# Altium PCB BMS_Slavee.PcbDoc (part 3 of 4)
Units mm, origin at the board's own origin, x right, y up, seen from the top; angles counter-clockwise.
Board outline 197.87 x 123.44 mm, 2 copper layers (Top Layer, Bottom Layer); 344 components, 178 nets, 953 pads, 755 vias.
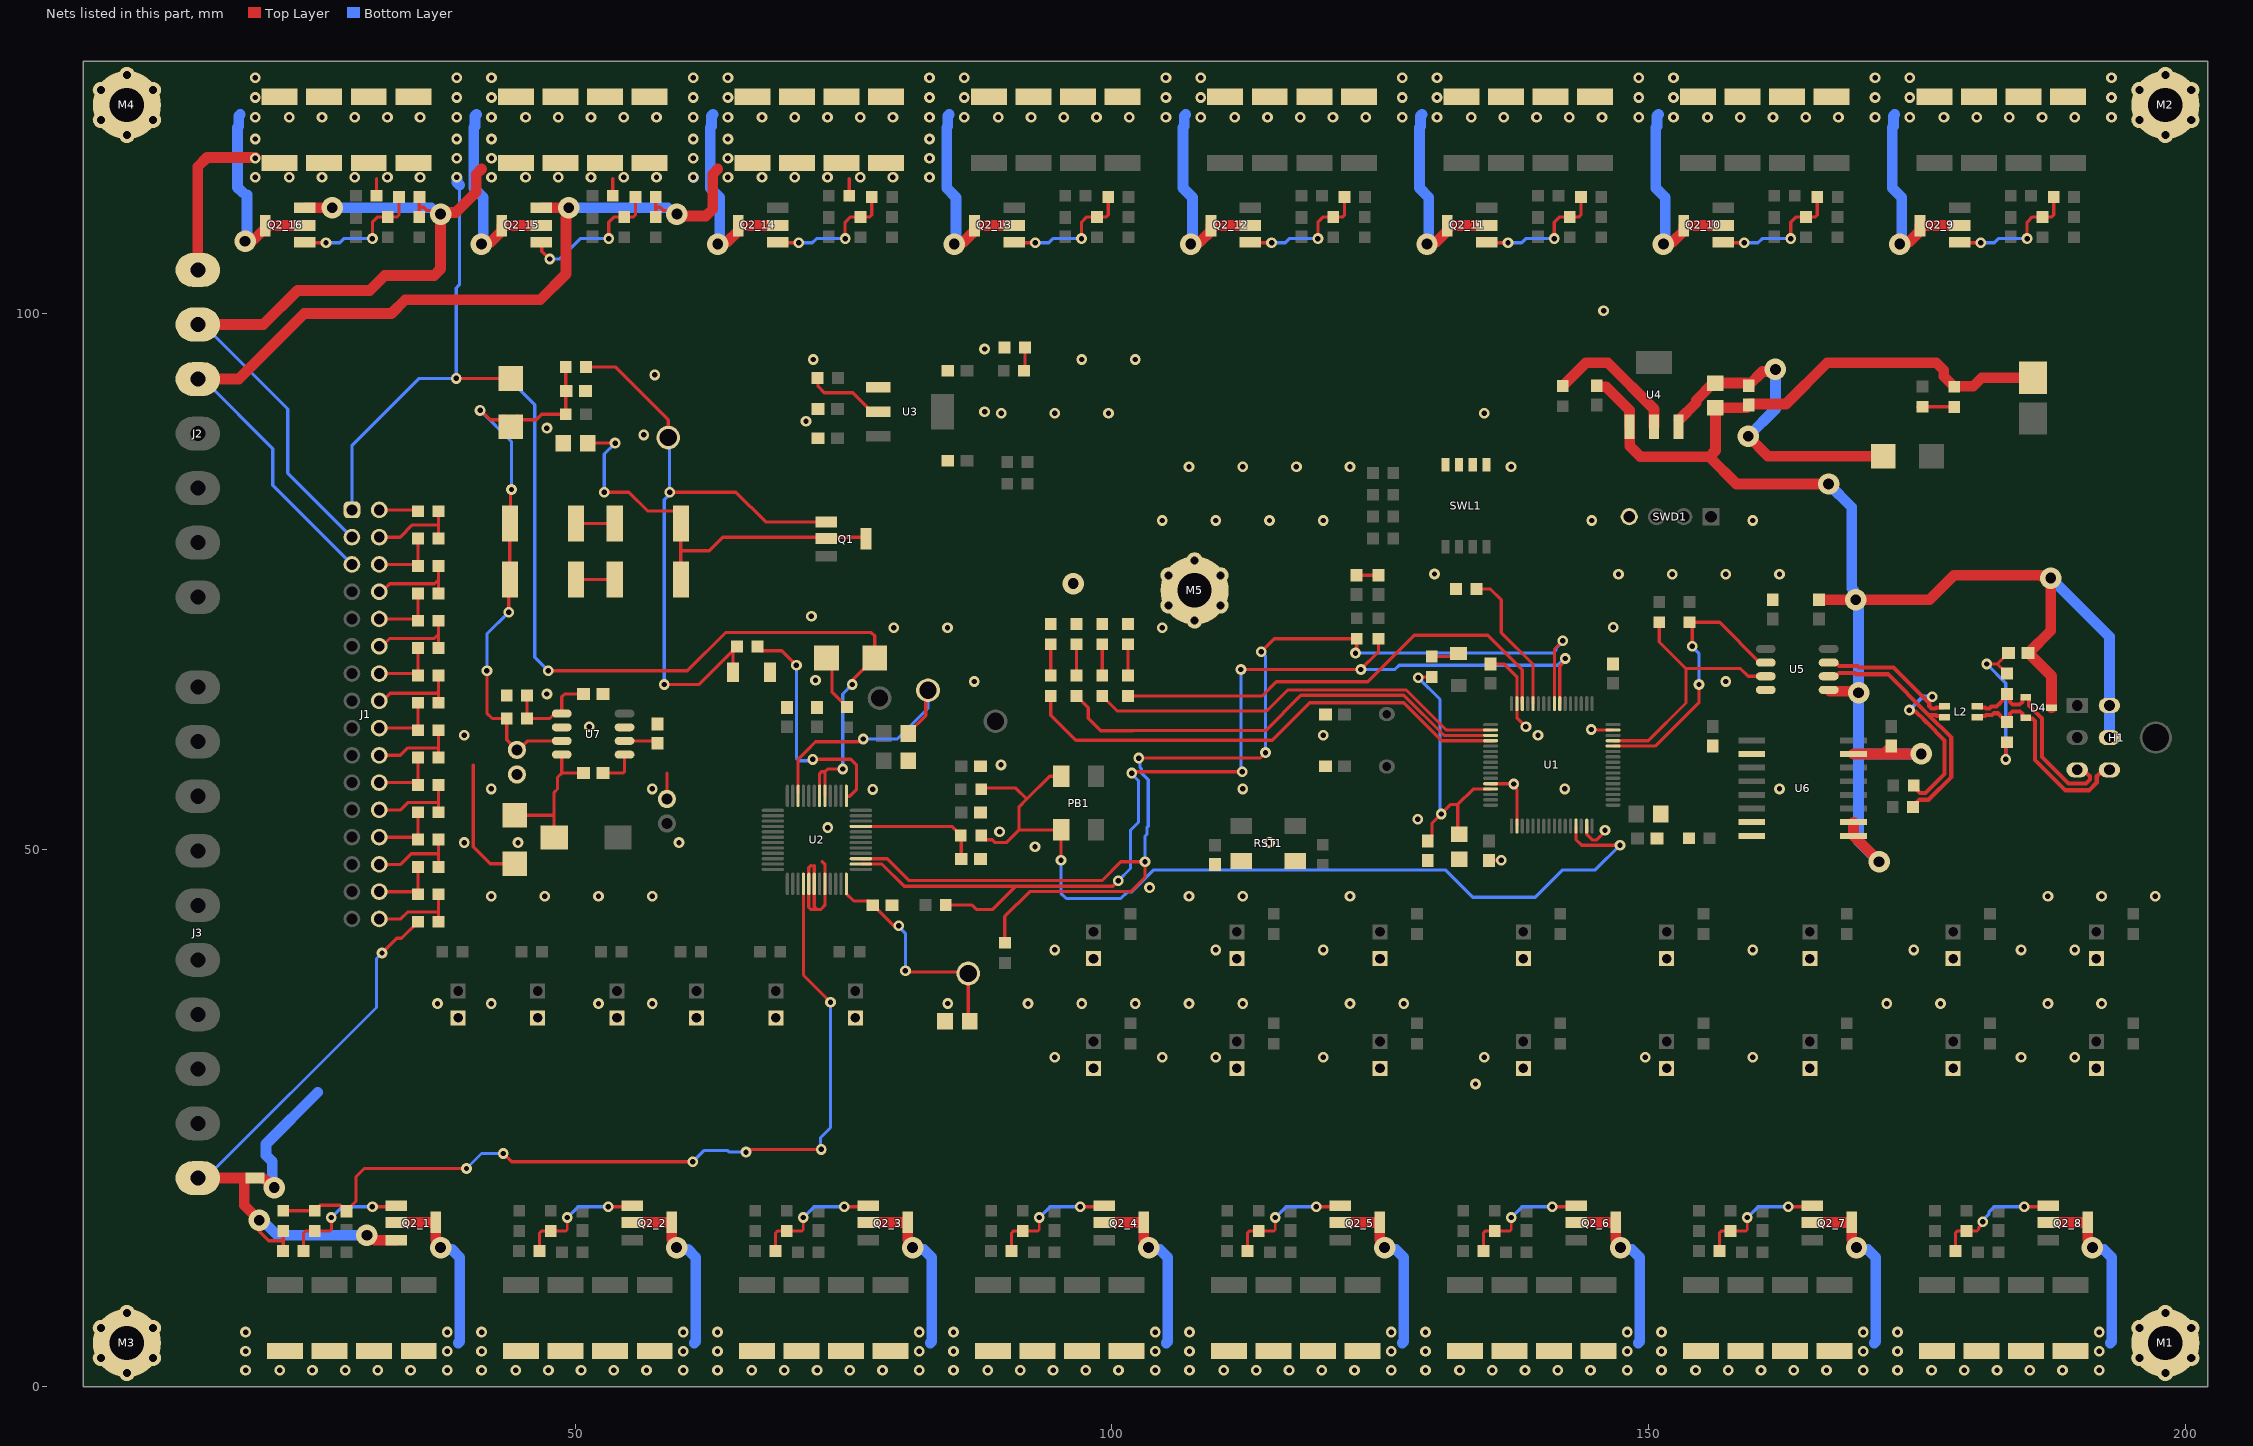
[diagram p3: the nets of this part, all layers, seen from the top]

## Via types
v1: diameter 1, hole 0.5, Top Layer to Bottom Layer, tented both sides, 697 vias
v2: diameter 2, hole 1, Top Layer to Bottom Layer, tented both sides, 58 vias

## Nets (pads, with @x,y where several pads share a name; then routed paths per layer and width w, separated by ;. In a path a pad name is that pad's centre, name@x,y a point inside that pad or via, vN(x,y) a via of type N, cw(c..) or ccw(c..) an arc to the next point about the centre after c; other vN are vias at no path point) (continued)
+Cell_14: J1.5 J2.5 Q2_15.3 R40_14.1 R41_14.1 R42_14.1 R43_14.1 R44_14.1 R46_15.1 R47_15.1 | length 94.3
  Top Layer w0.3: R47_15.1@57.502,108.957 57.502,109.855 ; R46_15.1@57.512,110.801 57.502,110.791 57.502,109.855 ; v2(59.483,109.22) 59.158,109.545 58.236,109.545 57.926,109.855 57.502,109.855 ; R40_14.1@75.527,110.928 75.527,112.517
  Top Layer w1: J2.5@14.859,93.853 18.669,93.853 24.765,99.949 32.893,99.949 34.179,101.235 46.752,101.235 49.149,103.632 49.149,108.847 49.213,108.911 49.213,109.618 v2(49.404,109.809) Q2_15.3@46.845,109.809 ; v2(59.483,109.22) 59.674,109.029 62.166,109.029 62.811,109.674 62.811,112.929 63.293,113.411
  Bottom Layer w0.3: J2.5@14.859,93.853 15.359,93.853 21.844,87.368 21.844,83.947 J1.5@29.21,76.581
  Bottom Layer w1: v2(49.404,109.809) 58.623,109.809 59.212,109.22 v2(59.483,109.22)
  other v1: 64.229,112.649 67.404,112.649 70.452,112.649 73.5,112.649 76.548,112.649 79.596,112.649 83.01,112.649 64.229,114.427 83.01,114.427 64.229,116.205 83.01,116.205
+Cell_15: J1.3 J2.6 Q2_16.3 R40_15.1 R41_15.1 R42_15.1 R43_15.1 R44_15.1 R46_16.1 R47_16.1 | length 81
  Top Layer w0.3: R47_16.1@35.484,108.957 35.484,109.855 ; R46_16.1@35.494,110.801 35.484,110.791 35.484,109.855 ; v2(37.465,109.22) 37.14,109.545 36.218,109.545 35.908,109.855 35.484,109.855 ; R40_15.1@53.509,110.928 53.509,112.517
  Top Layer w1: J2.6@14.859,98.933 20.955,98.933 24.13,102.108 30.861,102.108 32.258,103.505 36.879,103.505 37.465,104.091 v2(37.465,109.22) 37.598,109.353 38.868,109.353 40.793,111.278 40.793,112.929 41.275,113.411 ; Q2_16.3@24.827,109.809 v2(27.386,109.809)
  Bottom Layer w0.3: J2.6@14.859,98.933 15.367,98.933 23.241,91.059 23.241,85.09 J1.3@29.21,79.121
  Bottom Layer w1: v2(27.386,109.809) 36.605,109.809 37.194,109.22 v2(37.465,109.22) ; v1(60.992,112.649) v1@61.015,112.626
  other v1: 42.211,112.649 45.386,112.649 48.434,112.649 51.482,112.649 54.53,112.649 57.578,112.649 42.211,114.427 60.992,114.427 42.211,116.205 60.992,116.205
+Cell_16: D1.1 D2.1 J1.1 J2.7 R40_16.1 R41_16.1 R42_16.1 R43_16.1 R44_16.1 U2.41 U2.42 | length 145.2
  Top Layer w0.3: R40_16.1@31.491,110.928 31.491,112.517 ; v1(38.934,93.908) D2.1@44.012,93.908 ; v1(47.498,66.675) 60.452,66.675 64.008,70.231 77.597,70.231 77.906,69.922 D1.1@77.906,67.875 75.819,65.788 v1(75.819,65.405) ; U2.42@72.767,55.027 72.767,57.101 72.943,57.277 73.152,57.277 ; U2.41@73.267,55.027 73.267,57.162 73.152,57.277 ; v1(74.93,57.531) 73.521,57.531 73.267,57.277 73.152,57.277
  Top Layer w1: J2.7@14.859,104.013 14.859,113.633 15.716,114.49 v1@20.193,114.49
  Bottom Layer w0.3: J1.1@29.21,81.661 29.21,87.63 35.488,93.908 v1(38.934,93.908) ; 39.219,111.928 39.219,102.616 38.934,102.331 v1(38.934,93.908) ; v1(47.498,66.675) 46.228,67.945 46.228,91.44 43.76,93.908 v1(38.934,93.908) ; v1(74.93,57.531) 74.93,64.516 v1(75.819,65.405)
  Bottom Layer w1: v1(38.974,112.649) 38.997,112.626 38.997,112.15 39.219,111.928
  other v1: 20.193,112.649 23.368,112.649 26.416,112.649 29.464,112.649 32.512,112.649 35.56,112.649 20.193,114.427 38.974,114.427 20.193,116.205 38.974,116.205
-BalanceCommand_1: C25_1.1 R45_1.2 R47_1.2 U2.16 | length 81.2
  Top Layer w0.3: R47_1.2@22.809,16.387 R45_1.2@25.743,16.387 26.247,16.891 28.126,16.891 28.231,16.787 28.302,16.787 C25_1.1@28.702,16.387 ; C25_1.1@28.702,16.337 C25_1.1@28.702,16.387 ; v1(39.878,20.32) 30.353,20.32 29.591,19.558 29.591,17.276 C25_1.1@28.702,16.387 ; v1(43.307,21.717) 44.084,20.94 60.945,20.94 v1(60.96,20.955) ; v1(65.913,21.844) 66.04,21.844 66.294,22.098 v1(72.913,22.098) ; U2.16@71.267,46.827 71.267,38.334 v1(73.787,35.814)
  Bottom Layer w0.3: v1(39.878,20.32) 41.275,21.717 v1(43.307,21.717) ; v1(60.96,20.955) 61.991,21.986 64.227,21.986 64.369,21.844 v1(65.913,21.844) ; v1(72.913,22.098) 72.855,22.156 72.855,23.198 73.787,24.13 v1(73.787,35.814)
-Cell_1: J3.1 NT1.1 Q2_1.3 R27.1 R46_1.1 R47_1.1 | length 60.4
  Top Layer w0.3: v2(20.574,15.494) 20.574,14.478 21.463,13.589 22.809,13.589 ; R46_1.1@22.799,12.643 22.809,12.653 22.809,13.589 ; R47_1.1@22.809,14.487 22.809,13.589 ; v1(32.004,40.386) 33.379,41.761 33.826,41.761 R27.1@35.372,43.307
  Top Layer w1: J3.1@15.113,19.431 19.177,19.431 19.177,16.891 v2(20.574,15.494) ; v2(30.607,14.097) 30.878,14.097 31.34,13.635 Q2_1.3@33.339,13.635
  Bottom Layer w0.3: J3.1@15.113,19.431 15.613,19.431 31.496,35.314 31.496,39.878 v1(32.004,40.386)
  Bottom Layer w1: v2(20.574,15.494) 20.845,15.494 22.242,14.097 v2(30.607,14.097)
BOOT0: R11.2 U1.60 | length 13.6
  Top Layer w0.3: R11.2@133.961,74.295 135.255,74.295 136.271,73.279 136.271,70.231 139.22,67.282 U1.60@139.22,63.612
BREG: R34.2 U2.37 | length 22.5
  Top Layer w0.3: R34.2@66.98,68.943 67.38,68.543 69.252,68.543 v1(70.612,67.183) ; v1(72.136,58.42) 72.151,58.435 75.685,58.435 76.2,57.92 76.2,57.8 76.215,57.785 76.215,55.641 75.562,54.988 75.267,54.988 U2.37@75.267,55.027
  Bottom Layer w0.3: v1(70.612,67.183) 70.612,58.547 70.866,58.293 72.009,58.293 v1(72.136,58.42)
CAN_N: D4.1 H1.3 L2.4 R49.1 | length 19.5
  Top Layer w0.381: L2.4@180.595,63.365 180.705,63.255 181.338,63.255 181.411,63.182 181.726,63.182 181.902,63.358 182.409,63.358 182.703,63.653 182.703,63.692 R49.1@183.063,64.052 ; R49.1@183.37,64.521 183.645,64.246 183.645,63.761 183.868,63.538 184.551,63.538 184.799,63.787 184.799,64.087 184.909,64.196 D4.1@185.109,64.196 185.309,64.196 185.419,64.087 185.419,63.453 186.618,62.253 186.618,58.646 189.084,56.18 190.738,56.18 191.094,56.536 191.094,56.852 190.87,57.075 190.864,57.075 190.487,57.452 H1.3@189.911,57.452
CAN_P: D4.2 H1.4 L2.3 R50.1 | length 19.5
  Top Layer w0.381: L2.3@180.595,62.365 180.705,62.475 181.338,62.475 181.411,62.547 181.989,62.547 182.165,62.723 182.512,62.723 R50.1@183.063,62.172 ; R50.1@183.37,61.92 183.645,62.195 183.645,62.68 183.868,62.903 184.576,62.903 184.799,62.68 184.799,62.406 184.909,62.296 D4.2@185.109,62.296 185.192,62.213 185.76,62.213 185.983,61.99 185.983,58.383 188.821,55.545 191.001,55.545 191.729,56.273 191.729,56.852 191.952,57.075 191.958,57.075 192.335,57.452 H1.4@192.911,57.452
CAN_RX: R48.2 U1.44 U5.2 | length 26.2
  Top Layer w0.3: U1.44@146.67,59.662 150.594,59.662 154.686,63.754 v1(154.686,65.405) ; v1(154.051,68.961) 154.051,70.942 R48.2@153.797,71.196 156.596,71.196 160.355,67.437 U5.2@160.905,67.437
  Bottom Layer w0.3: v1(154.051,68.961) 154.051,68.888 154.686,68.253 v1(154.686,65.405)
CAN_TX: R36.2 U1.45 U5.3 | length 24.5
  Top Layer w0.3: U1.45@146.67,60.162 149.951,60.162 153.467,63.678 153.467,66.878 ; R36.2@150.985,71.196 150.985,69.36 153.467,66.878 ; U5.3@160.905,66.167 159.258,66.167 158.547,66.878 153.467,66.878
CANIN_N: L2.1 R56.2 U5.7 | length 27.7
  Top Layer w0.381: U5.7@166.755,67.437 167.395,67.437 167.713,67.12 169.456,67.12 169.583,66.992 172.793,66.992 175.074,64.711 176.127,63.658 ; v1(174.281,63.018) 174.399,62.9 174.837,62.9 175.665,62.072 175.851,61.886 177.546,60.191 177.546,57.048 175.798,55.3 175.259,55.3 175.036,55.523 175.036,55.629 R56.2@174.676,55.989 ; v1(176.403,64.262) 176.403,64.094 176.127,63.819 176.127,63.658 ; L2.1@177.545,63.365 177.435,63.255 176.802,63.255 176.729,63.182 176.35,63.182 176.127,63.406 176.127,63.658
  Bottom Layer w0.381: v1(174.281,63.018) 175.525,64.262 v1(176.403,64.262)
CANIN_P: L2.2 R57.1 U5.6 | length 24
  Top Layer w0.381: U5.6@166.755,66.167 167.395,66.167 167.713,66.484 169.193,66.484 169.32,66.358 172.239,66.358 ; 172.277,66.358 175.928,62.707 176.114,62.521 178.181,60.454 178.181,56.785 176.061,54.665 175.203,54.665 174.98,54.441 174.98,54.335 R57.1@174.62,53.975 ; 176.141,62.547 176.729,62.547 176.802,62.475 177.435,62.475 L2.2@177.545,62.365
GND: C1.2 C2.1 C3.2 C4.1 C5.2 C6.2 C8.2 C9.2 C10.2 C11.2 C12.1 C13.1 C14.1 C15.1 C16.1 C17.1 C18.1 C19.1 C21.2 C22.1 C23.1 C24.1 C30.1 C32.2 C33.1 C34.1 C35.1 C36.1 C37.2 C38.2 C39.2 C40.1 D3.2 D9.1 LED1.2 LED2.2 LED3.2 LED4.2 LED5.2 NT1.2 R11.1 R58.2 R73.1 RST1.2 SWD1.4 SWL1.1 SWL1.2 SWL1.3 SWL1.4 TS_1.2 TS_2.2 TS_3.2 TS_4.2 TS_5.2 TS_6.2 TS_7.2 TS_8.2 TS_9.2 TS_10.2 TS_11.2 TS_12.2 TS_13.2 TS_14.2 TS_15.2 TS_16.2 TS_17.2 TS_18.2 TS_19.2 TS_20.2 TS_21.2 TS_22.2 U1.12 U1.18 U1.31 U1.47 U1.63 U2.17 U2.18 U2.20 U3.1 U5.4 U6.2 U6.7 U6.8 U7.3 U7.6 | length 63.7
  Top Layer w0.3: 40.513,57.912 40.513,50.292 42.092,48.713 D9.1@44.38,48.713 ; C34.1@58.547,54.737 58.547,57.15 ; 72.009,48.514 71.943,48.514 71.767,48.338 U2.17@71.767,46.827 71.767,44.626 71.943,44.45 72.517,44.45 ; 72.263,48.514 72.267,48.51 U2.18@72.267,46.827 72.267,44.7 72.517,44.45 ; 73.025,48.895 73.267,48.653 U2.20@73.267,46.827 73.267,44.819 72.898,44.45 72.517,44.45 ; C24.1@79.474,44.831 C24.1@79.524,44.831 ; C3.2@122.784,75.576 C1.2@124.841,75.576 ; C9.2@135.128,49.011 135.139,49.022 v1(136.271,49.022) ; C10.2@135.255,67.321 136.514,67.321 137.72,66.115 U1.63@137.72,63.612 137.72,62.305 v1(138.557,61.468) ; U1.12@135.27,56.162 137.386,56.162 v1(137.414,56.134) 137.414,55.945 137.72,55.639 U1.18@137.72,52.212 ; U1.31@144.22,52.212 144.22,51.455 144.748,50.927 145.161,50.927 145.923,51.689 v1(145.923,51.816) ; v1(144.653,61.214) 144.705,61.162 U1.47@146.67,61.162
  Top Layer w1: NT1.2@21.005,19.371 v2(21.971,18.542)
  Bottom Layer w1: v2(21.971,18.542) 21.78,18.733 21.78,20.971 21.209,21.542 21.209,22.606 26.035,27.432
  other v1: 133.858,28.194 94.68,30.676 104.68,30.676 109.68,30.676 119.68,30.676 134.68,30.676 149.68,30.676 159.68,30.676 184.68,30.676 189.68,30.676 37.18,35.676 42.18,35.676 52.18,35.676 57.18,35.676 84.709,35.687 92.18,35.676 97.18,35.676 102.18,35.676 107.18,35.676 112.18,35.676 122.18,35.676 127.18,35.676 172.18,35.676 177.18,35.676 187.18,35.676 192.18,35.676 94.68,40.676 109.68,40.676 119.68,40.676 159.68,40.676 174.68,40.676 184.68,40.676 189.68,40.676 42.18,45.676 47.18,45.676 52.18,45.676 57.18,45.676 107.18,45.676 112.18,45.676 122.18,45.676 187.18,45.676 192.18,45.676 197.18,45.676 103.505,46.482 92.837,50.292 39.68,50.676 44.68,50.676 59.68,50.676 114.68,50.676 89.535,51.689 73.533,52.07 128.486,52.853 77.724,55.626 42.18,55.676 57.18,55.676 112.18,55.676 142.18,55.676 162.18,55.676 89.662,57.912 39.68,60.676 119.68,60.676 139.68,60.676 51.308,61.468 47.371,64.516 87.18,65.676 157.18,65.676 72.39,65.786 79.68,70.676 84.68,70.676 104.68,70.676 146.685,70.739 72.009,71.755 147.18,75.676 152.18,75.676 157.18,75.676 162.18,75.676 130.048,75.692 104.68,80.676 109.68,80.676 114.68,80.676 119.68,80.676 144.68,80.676 159.68,80.676 107.18,85.676 112.18,85.676 117.18,85.676 122.18,85.676 137.18,85.676 56.388,88.646 47.371,89.281 71.501,89.916 89.68,90.676 94.68,90.676 99.68,90.676 134.68,90.676 88.138,90.805 57.404,94.234 72.18,95.676 97.18,95.676 102.18,95.676 88.138,96.647 145.796,100.203
  other v2: 96.393,74.803
GND-ISO: C26.1 C27.1 C28.1 C29.1 C31.1 C41.1 D4.3 D8.2 H1.5 H1.6 LED6.2 U4.1 U5.5 U6.9 U6.10 U6.15 | length 175.9
  Top Layer w1: C26.1@145.161,93.229 145.161,93.179 145.211,93.129 146.012,93.129 148.205,90.936 U4.1@148.205,89.404 148.23,89.379 148.23,87.609 149.225,86.614 155.624,86.614 ; C29.1@159.321,91.429 159.321,91.379 159.121,91.179 C27.1@156.21,91.179 156.21,87.2 155.624,86.614 ; C29.1@159.371,91.529 162.776,91.529 166.624,95.377 176.772,95.377 177.479,94.67 177.479,94.123 LED6.2@178.463,93.139 ; C31.1@165.862,73.29 v2(169.28,73.29) 176.16,73.29 178.435,75.565 186.491,75.565 186.554,75.502 187.261,75.502 v2(187.452,75.311) 187.452,70.413 C28.1@185.365,68.326 ; v2(166.751,84.074) 158.164,84.074 155.624,86.614 ; U5.5@166.88,64.772 169.416,64.772 v2(169.545,64.643) ; U6.10@169.072,52.578 U6.9@169.072,51.308 171.358,49.022 v2@171.405,49.022 ; U6.15@169.072,58.928 171.886,58.928 ; C41.1@172.593,59.685 172.593,59.635 171.886,58.928 ; v2(175.387,58.928) 171.886,58.928 ; LED6.2@178.513,93.189 180.222,93.189 181.013,93.98 D8.2@185.801,93.98 ; C28.1@185.315,68.326 C28.1@185.365,68.326 ; D4.3@187.509,63.246 187.509,66.182 C28.1@185.365,68.326
  Bottom Layer w1: v2(166.751,84.074) 168.91,81.915 168.91,74.367 169.089,74.188 169.089,73.481 v2(169.28,73.29) ; v2@169.28,73.019 169.545,72.754 v2(169.545,64.643) 169.545,58.928 ; v2(171.45,48.895) 169.545,50.8 169.545,58.928 ; v2(175.387,58.928) 169.545,58.928 ; v2(187.452,75.311) 192.911,69.852 H1.6@192.911,63.452 H1.5@192.911,60.452
LED1: R8.2 U1.62 | length 43.5
  Top Layer w0.3: R8.2@101.501,64.328 113.985,64.328 115.316,65.659 123.825,65.659 128.143,69.977 135.001,69.977 138.22,66.758 U1.62@138.22,63.612
LED2: R5.2 U1.2 | length 39.1
  Top Layer w0.3: R5.2@99.102,64.328 100.502,62.928 114.403,62.928 116.364,64.889 127.406,64.889 131.133,61.162 U1.2@135.27,61.162
LED3: R6.2 U1.3 | length 43.4
  Top Layer w0.3: R6.2@96.703,64.328 97.787,63.243 97.787,62.239 98.94,61.087 101.973,61.087 101.988,61.102 114.315,61.102 117.602,64.389 127.199,64.389 130.926,60.662 U1.3@135.27,60.662
LED4: R7.2 U1.4 | length 46.9
  Top Layer w0.3: R7.2@94.304,64.328 94.304,62.541 96.647,60.198 102.362,60.198 114.935,60.198 118.429,63.692 127.189,63.692 130.719,60.162 U1.4@135.509,60.162
NetC7_1: C7.1 D9.2 L3.1 U7.8 | length 14
  Top Layer w0.3: D9.2@44.38,53.213 48.043,53.213 ; L3.1@48.043,51.137 48.043,53.213 ; U7.8@48.754,58.875 48.754,57.15 ; U7.8@49.182,58.875 U7.8@49.39,58.667 ; C7.1@50.789,57.15 48.754,57.15 ; 48.043,53.213 48.043,55.352 48.354,55.663 48.354,56.75 48.754,57.15
NetC7_2: C7.2 U7.1 | length 3.6
  Top Layer w0.3: C7.2@52.589,57.15 54.428,57.15 54.604,57.326 U7.1@54.604,58.875
NetC13_2: C13.2 C33.2 D2.2 R29.1 R30.2 R31.2 R63.2 R65.2 U7.7 | length 54.1
  Top Layer w0.3: v1(41.148,90.932) 41.202,90.932 42.076,90.058 D2.2@43.362,90.058 ; v1(41.783,66.675) 41.783,62.738 42.291,62.23 R63.2@43.627,62.23 43.627,60.259 C33.2@44.577,59.309 44.743,59.309 45.579,60.145 U7.7@48.754,60.145 ; v1(43.815,72.136) 43.815,75.084 R31.2@43.915,75.184 R30.2@43.915,80.391 43.992,80.468 43.992,83.489 v1(44.069,83.566) ; D2.2@44.662,90.058 46.375,90.058 46.886,90.569 R65.2@49.123,90.569 R29.1@49.123,94.978
  Top Layer w1: D2.2@43.362,90.058 D2.2@44.012,89.408 D2.2@44.662,90.058
  Bottom Layer w0.3: v1(41.148,90.932) 44.069,88.011 v1(44.069,83.566) ; v1@41.783,66.294 v1(41.783,66.675) 41.783,70.104 v1(43.815,72.136)
NetC15_2: C15.2 Q1.2 R32.1 R33.1 | length 38.6
  Top Layer w0.3: C15.2@51.188,87.884 v1(53.721,87.884) ; v1(52.705,83.312) 54.991,83.312 56.737,81.566 59.594,81.566 59.844,81.316 R32.1@59.844,80.391 ; R33.1@59.844,75.538 59.844,77.851 ; R32.1@59.844,79.498 R32.1@60.094,79.248 ; R32.1@59.844,79.553 59.844,77.851 ; Q1.2@77.089,78.994 76.962,79.121 63.754,79.121 62.484,77.851 59.844,77.851
  Bottom Layer w0.3: v1(52.705,83.312) 52.705,86.868 v1(53.721,87.884)
NetC20_2: C20.2 TP2.1 U2.46 | length 24.4
  Top Layer w0.3: U2.46@70.767,55.245 70.767,58.456 71.508,59.197 71.516,59.197 72.39,60.071 76.581,60.071 v1(76.835,60.325) ; C20.2@81.033,60.833 81.033,60.883 82.656,62.505 82.656,65.076 TP2.1@82.573,65.158
  Bottom Layer w0.3: v1(76.835,60.325) 80.01,60.325 82.867,63.182 TP2.1@82.867,64.864 TP2.1@82.573,65.158
NetC22_2: C22.2 R38.1 U2.33 | length 11.9
  Top Layer w0.3: U2.33@76.617,52.177 85.074,52.177 85.968,51.283 C22.2@85.968,49.149
NetC23_2: C23.2 C24.2 TP7.1 U2.24 | length 21.7
  Top Layer w0.3: U2.24@75.267,46.736 75.267,45.927 75.963,45.231 77.324,45.231 C24.2@77.724,44.831 77.774,44.831 79.679,42.926 v1(80.137,42.926) ; v1(80.765,38.735) 80.877,38.623 86.472,38.623 TP7.1@86.614,38.481 86.614,34.297 C23.2@86.748,34.163
  Bottom Layer w0.3: v1(80.137,42.926) 80.137,42.838 80.765,42.21 v1(80.765,38.735)
NetC27_2: C27.2 C29.2 D7.2 U4.3 | length 31.7
  Top Layer w1: U4.3@152.81,90.029 154.415,91.634 154.415,91.874 C27.2@156.02,93.479 ; C27.2@156.21,93.479 158.503,93.479 159.121,93.479 C29.2@159.321,93.279 ; v2(159.258,88.519) 161.106,86.671 D7.2@171.831,86.671 ; C29.2@159.321,93.229 C29.2@159.321,93.279 ; v2(161.798,94.742) 161.607,94.551 160.592,94.551 C29.2@159.321,93.279
  Bottom Layer w1: v2(159.258,88.519) 161.798,91.059 v2(161.798,94.742)
NetC28_2: C28.2 R49.2 R50.2 | length 15
  Top Layer w0.3: v1(181.483,67.31) 182.449,67.31 183.465,68.326 C28.2@183.515,68.326 ; 182.481,67.31 R49.2@183.37,66.421 ; v1(183.261,58.42) 183.261,59.911 R50.2@183.37,60.02
  Bottom Layer w0.3: v1(181.483,67.31) 183.261,65.532 v1(183.261,58.42)
NetC35_2: C35.2 R63.1 R73.2 U7.5 | length 9.3
  Top Layer w0.3: R73.2@45.527,64.389 R63.1@45.527,62.23 47.627,62.23 48.082,62.685 U7.5@48.754,62.685 48.754,64.248 49.022,64.516 C35.2@50.789,64.516
NetC36_2: C36.2 U7.2 | length 3.1
  Top Layer w0.3: U7.2@54.604,60.145 57.435,60.145 C36.2@57.658,59.922
NetC38_1: C38.1 C39.1 R53.1 U1.13 | length 26.3
  Top Layer w0.3: v1(128.524,66.04) 128.59,66.106 R53.1@129.794,66.106 ; C39.1@129.413,50.811 129.813,51.211 129.813,52.47 131.572,54.229 132.217,54.229 ; C38.1@132.334,51.442 132.217,51.559 132.217,54.229 ; U1.13@135.27,55.662 133.65,55.662 132.217,54.229
  Bottom Layer w0.3: v1(128.524,66.04) 130.556,64.008 130.556,53.467 v1(130.683,53.34)
NetD1_2: D1.2 R28.1 | length 5.3
  Top Layer w0.3: D1.2@73.406,67.875 73.914,67.367 73.914,64.715 R28.1@75.311,63.318
NetD3_1: D3.1 Q1.1 R29.2 R34.1 TP3.1 | length 60.7
  Top Layer w0.3: R29.2@51.023,94.978 53.739,94.978 58.674,90.043 TP3.1@58.674,88.392 ; v1(58.293,65.405) 61.542,65.405 R34.1@64.696,68.559 ; v1(58.801,83.312) 58.867,83.378 59.116,83.378 59.182,83.312 64.968,83.312 67.736,80.544 Q1.1@73.409,80.544 ; D3.1@64.696,66.548 R34.1@64.696,68.559 ; R34.1@65.08,68.943 R34.1@64.696,68.559
  Bottom Layer w0.3: v1(58.293,65.405) 58.293,82.615 58.801,83.123 v1(58.801,83.312) 58.801,88.265 TP3.1@58.674,88.392
NetJ1_2: J1.2 R12.2 | length 3.7
  Top Layer w0.3: J1.2@31.75,81.661 35.245,81.661 R12.2@35.372,81.534
NetJ1_4: J1.4 R12.1 R13.2 | length 8.5
  Top Layer w0.3: J1.4@31.75,79.121 33.695,79.121 34.838,80.264 37.211,80.264 37.272,80.203 ; R13.2@37.272,78.986 37.272,79.822 ; 37.272,79.886 37.272,80.264 R12.1@37.272,81.534
NetJ1_6: J1.6 R13.1 R14.2 | length 6.2
  Top Layer w0.3: J1.6@31.75,76.581 35.228,76.581 R14.2@35.372,76.437 R13.1@35.372,78.986
NetJ1_8: J1.8 R14.1 R15.2 | length 8.5
  Top Layer w0.3: J1.8@31.75,74.041 31.987,74.041 32.735,74.789 36.898,74.789 37.272,75.163 ; R15.2@37.272,73.889 37.272,75.163 ; R14.1@37.272,76.437 37.272,75.163
NetJ1_10: J1.10 R15.1 R16.2 | length 6.2
  Top Layer w0.3: J1.10@31.75,71.501 35.211,71.501 R16.2@35.372,71.34 R15.1@35.372,73.889
NetJ1_12: J1.12 R16.1 R17.2 | length 8.5
  Top Layer w0.3: J1.12@31.75,68.961 32.021,68.961 32.752,69.692 36.898,69.692 37.272,70.066 ; R17.2@37.272,68.792 37.272,70.066 ; R16.1@37.272,71.34 37.272,70.066
NetJ1_14: J1.14 R17.1 R18.2 | length 6.2
  Top Layer w0.3: J1.14@31.75,66.421 35.194,66.421 R18.2@35.372,66.243 R17.1@35.372,68.792
NetJ1_16: J1.16 R18.1 R19.2 | length 8.1
  Top Layer w0.3: J1.16@31.75,63.881 32.055,63.881 32.769,64.595 37.097,64.595 37.272,64.77 ; R19.2@37.272,63.986 37.272,64.77 ; R18.1@37.272,66.243 37.272,64.77
NetJ1_18: J1.18 R19.1 R20.2 | length 6.3
  Top Layer w0.3: J1.18@31.75,61.341 35.177,61.341 R20.2@35.372,61.146 R19.1@35.372,63.695
NetJ1_20: J1.20 R20.1 R21.2 | length 8.4
  Top Layer w0.3: J1.20@31.75,58.801 33.729,58.801 34.426,59.498 37.272,59.498 ; R21.2@37.272,58.598 37.272,59.498 ; R20.1@37.272,61.146 37.272,59.498
NetJ1_22: J1.22 R21.1 R22.2 | length 6.3
  Top Layer w0.3: J1.22@31.75,56.261 35.16,56.261 R22.2@35.372,56.049 R21.1@35.372,58.598
NetJ1_24: J1.24 R22.1 R23.2 | length 8.4
  Top Layer w0.3: J1.24@31.75,53.721 33.738,53.721 34.418,54.401 37.272,54.401 ; R23.2@37.272,53.501 37.272,54.401 ; R22.1@37.272,56.049 37.272,54.401
NetJ1_26: J1.26 R23.1 R24.2 | length 6.3
  Top Layer w0.3: J1.26@31.75,51.181 35.143,51.181 R24.2@35.372,50.952 R23.1@35.372,53.501
NetJ1_28: J1.28 R24.1 R25.2 | length 8.5
  Top Layer w0.3: J1.28@31.75,48.641 33.746,48.641 34.738,49.633 37.272,49.633 ; R25.2@37.272,48.404 37.272,49.633 ; R24.1@37.272,50.952 37.272,49.633
NetJ1_30: J1.30 R25.1 R26.2 | length 6.3
  Top Layer w0.3: J1.30@31.75,46.101 35.126,46.101 R26.2@35.372,45.855 R25.1@35.372,48.404
NetJ1_32: J1.32 R26.1 R27.2 | length 8.3
  Top Layer w0.3: J1.32@31.75,43.561 33.755,43.561 34.401,44.207 37.272,44.207 ; R27.2@37.272,43.307 37.272,44.207 ; R26.1@37.272,45.855 37.272,44.207
NetL1_2: L1.2 R53.2 | length 2.6
  Top Layer w0.3: R53.2@129.794,68.006 131.988,68.006 L1.2@132.284,68.302
NetLED1_1: LED1.1 R8.1 | length 2.9
  Top Layer w0.3: R8.1@101.501,66.228 LED1.1@101.501,69.141
NetLED2_1: LED2.1 R5.1 | length 2.9
  Top Layer w0.3: R5.1@99.102,66.228 LED2.1@99.102,69.141
NetLED3_1: LED3.1 R6.1 | length 2.9
  Top Layer w0.3: R6.1@96.703,66.228 LED3.1@96.703,69.141
NetLED4_1: LED4.1 R7.1 | length 2.9
  Top Layer w0.3: R7.1@94.304,66.228 LED4.1@94.304,69.141
NetLED5_1: LED5.1 R37.2 | length 2.3
  Top Layer w0.3: R37.2@91.821,94.615 91.895,94.615 LED5.1@91.895,96.802
NetLED6_1: LED6.1 R35.2 | length 3.4
  Top Layer w0.3: R35.2@175.064,91.262 178.44,91.262 LED6.1@178.463,91.239
NetM1_1: M1.1 M1.2 M1.3 M1.4 M1.5 M1.6 M1.7
NetM2_1: M2.1 M2.2 M2.3 M2.4 M2.5 M2.6 M2.7
NetM3_1: M3.1 M3.2 M3.3 M3.4 M3.5 M3.6 M3.7
NetM4_1: M4.1 M4.2 M4.3 M4.4 M4.5 M4.6 M4.7
NetM5_1: M5.1 M5.2 M5.3 M5.4 M5.5 M5.6 M5.7
NetPB1_1: PB1.1 R38.2 R39.1 U1.29 | length 88.1
  Top Layer w0.3: R38.2@87.818,51.333 88.218,50.933 88.867,50.933 89.123,50.678 90.175,50.678 91.353,51.856 ; R39.1@87.818,55.651 87.92,55.753 91.059,55.753 92.075,54.737 ; v1(95.25,49.037) 95.25,51.832 PB1.1@95.274,51.856 91.353,51.856 ; PB1.1@95.274,56.856 94.194,56.856 92.075,54.737 ; U1.29@143.22,52.212 143.22,50.963 143.764,50.419 v1(147.32,50.419) ; 91.353,51.856 91.353,54.015 92.075,54.737
  Bottom Layer w0.3: v1(95.25,49.037) 95.25,45.974 95.758,45.466 100.838,45.466 101.473,46.101 101.846,46.101 103.878,48.133 131.064,48.133 133.612,45.585 139.438,45.585 141.986,48.133 145.034,48.133 v1(147.32,50.419)
NetQ2_1_1: Q2_1.1 R45_1.1 R46_1.2 | length 12
  Top Layer w0.254: R45_1.1@25.743,14.487 27.148,14.487 27.296,14.635 v1@27.296,15.739
  Top Layer w0.3: R46_1.2@24.699,12.643 24.699,14.311 24.875,14.487 R45_1.1@25.743,14.487 ; v1(27.288,15.748) v1@27.296,15.739 ; v1(31.115,16.764) 33.258,16.764 Q2_1.1@33.339,16.845
  Bottom Layer w0.3: v1(27.288,15.748) 28.304,16.764 v1(31.115,16.764)
NetQ2_1_2: Q2_1.2 R41_1.2 R42_1.2 R43_1.2 R44_1.2 | length 16.4
  Top Layer w1: Q2_1.2@33.339,15.295 Q2_1.2@37.019,15.295 37.019,13.671 37.465,13.225 v2(37.465,12.954)
  Bottom Layer w1: v2(37.465,12.954) 37.656,12.763 38.521,12.763 39.251,12.033 39.251,4.199 39.116,4.064
  other v1: 19.304,1.524 22.479,1.524 25.527,1.524 28.575,1.524 31.623,1.524 34.671,1.524 38.085,1.524 19.304,3.302 38.085,3.302 19.304,5.08 38.085,5.08
NetQ2_2_1: Q2_2.1 R45_2.1 R46_2.2 | length 12
  Top Layer w0.254: R45_2.1@47.724,14.487 49.129,14.487 49.277,14.635 v1@49.277,15.739
  Top Layer w0.3: R46_2.2@46.68,12.643 46.68,14.311 46.856,14.487 R45_2.1@47.724,14.487 ; v1(49.269,15.748) v1@49.277,15.739 ; v1(53.096,16.764) 55.239,16.764 Q2_2.1@55.32,16.845
  Bottom Layer w0.3: v1(49.269,15.748) 50.285,16.764 v1(53.096,16.764)
NetQ2_2_2: Q2_2.2 R41_2.2 R42_2.2 R43_2.2 R44_2.2 | length 16.4
  Top Layer w1: Q2_2.2@55.32,15.295 Q2_2.2@59,15.295 59,13.671 59.446,13.225 v2(59.446,12.954)
  Bottom Layer w1: v2(59.446,12.954) 59.637,12.763 60.502,12.763 61.232,12.033 61.232,4.199 61.097,4.064
  other v1: 41.285,1.524 44.46,1.524 47.508,1.524 50.556,1.524 53.604,1.524 56.652,1.524 60.066,1.524 41.285,3.302 60.066,3.302 41.285,5.08 60.066,5.08
NetQ2_3_1: Q2_3.1 R45_3.1 R46_3.2 | length 12
  Top Layer w0.254: R45_3.1@69.705,14.487 71.11,14.487 71.258,14.635 v1@71.258,15.739
  Top Layer w0.3: R46_3.2@68.661,12.643 68.661,14.311 68.837,14.487 R45_3.1@69.705,14.487 ; v1(71.25,15.748) v1@71.258,15.739 ; v1(75.077,16.764) 77.22,16.764 Q2_3.1@77.301,16.845
  Bottom Layer w0.3: v1(71.25,15.748) 72.266,16.764 v1(75.077,16.764)
NetQ2_3_2: Q2_3.2 R41_3.2 R42_3.2 R43_3.2 R44_3.2 | length 16.4
  Top Layer w1: Q2_3.2@77.301,15.295 Q2_3.2@80.981,15.295 80.981,13.671 81.427,13.225 v2(81.427,12.954)
  Bottom Layer w1: v2(81.427,12.954) 81.618,12.763 82.483,12.763 83.213,12.033 83.213,4.199 83.078,4.064
  other v1: 63.266,1.524 66.441,1.524 69.489,1.524 72.537,1.524 75.585,1.524 78.633,1.524 82.047,1.524 63.266,3.302 82.047,3.302 63.266,5.08 82.047,5.08
NetQ2_4_1: Q2_4.1 R45_4.1 R46_4.2 | length 12
  Top Layer w0.254: R45_4.1@91.686,14.487 93.091,14.487 93.239,14.635 v1@93.239,15.739
  Top Layer w0.3: R46_4.2@90.642,12.643 90.642,14.311 90.818,14.487 R45_4.1@91.686,14.487 ; v1(93.231,15.748) v1@93.239,15.739 ; v1(97.058,16.764) 99.201,16.764 Q2_4.1@99.282,16.845
  Bottom Layer w0.3: v1(93.231,15.748) 94.247,16.764 v1(97.058,16.764)
NetQ2_4_2: Q2_4.2 R41_4.2 R42_4.2 R43_4.2 R44_4.2 | length 16.4
  Top Layer w1: Q2_4.2@99.282,15.295 Q2_4.2@102.962,15.295 102.962,13.671 103.408,13.225 v2(103.408,12.954)
  Bottom Layer w1: v2(103.408,12.954) 103.599,12.763 104.464,12.763 105.194,12.033 105.194,4.199 105.059,4.064
  other v1: 85.247,1.524 88.422,1.524 91.47,1.524 94.518,1.524 97.566,1.524 100.614,1.524 104.028,1.524 85.247,3.302 104.028,3.302 85.247,5.08 104.028,5.08
NetQ2_5_1: Q2_5.1 R45_5.1 R46_5.2 | length 12
  Top Layer w0.254: R45_5.1@113.667,14.487 115.072,14.487 115.22,14.635 v1@115.22,15.739
  Top Layer w0.3: R46_5.2@112.623,12.643 112.623,14.311 112.799,14.487 R45_5.1@113.667,14.487 ; v1(115.212,15.748) v1@115.22,15.739 ; v1(119.039,16.764) 121.182,16.764 Q2_5.1@121.263,16.845
  Bottom Layer w0.3: v1(115.212,15.748) 116.228,16.764 v1(119.039,16.764)
NetQ2_5_2: Q2_5.2 R41_5.2 R42_5.2 R43_5.2 R44_5.2 | length 16.4
  Top Layer w1: Q2_5.2@121.263,15.295 Q2_5.2@124.943,15.295 124.943,13.671 125.389,13.225 v2(125.389,12.954)
  Bottom Layer w1: v2(125.389,12.954) 125.58,12.763 126.445,12.763 127.175,12.033 127.175,4.199 127.04,4.064
  other v1: 107.228,1.524 110.403,1.524 113.451,1.524 116.499,1.524 119.547,1.524 122.595,1.524 126.009,1.524 107.228,3.302 126.009,3.302 107.228,5.08 126.009,5.08
NetQ2_6_1: Q2_6.1 R45_6.1 R46_6.2 | length 12
  Top Layer w0.254: R45_6.1@135.648,14.487 137.053,14.487 137.201,14.635 v1@137.201,15.739
  Top Layer w0.3: R46_6.2@134.604,12.643 134.604,14.311 134.78,14.487 R45_6.1@135.648,14.487 ; v1(137.193,15.748) v1@137.201,15.739 ; v1(141.02,16.764) 143.163,16.764 Q2_6.1@143.244,16.845
  Bottom Layer w0.3: v1(137.193,15.748) 138.209,16.764 v1(141.02,16.764)
NetQ2_6_2: Q2_6.2 R41_6.2 R42_6.2 R43_6.2 R44_6.2 | length 16.4
  Top Layer w1: Q2_6.2@143.244,15.295 Q2_6.2@146.924,15.295 146.924,13.671 147.37,13.225 v2(147.37,12.954)
  Bottom Layer w1: v2(147.37,12.954) 147.561,12.763 148.426,12.763 149.156,12.033 149.156,4.199 149.021,4.064
  other v1: 129.209,1.524 132.384,1.524 135.432,1.524 138.48,1.524 141.528,1.524 144.576,1.524 147.99,1.524 129.209,3.302 147.99,3.302 129.209,5.08 147.99,5.08
NetQ2_7_1: Q2_7.1 R45_7.1 R46_7.2 | length 12
  Top Layer w0.254: R45_7.1@157.629,14.487 159.034,14.487 159.182,14.635 v1@159.182,15.739
  Top Layer w0.3: R46_7.2@156.585,12.643 156.585,14.311 156.761,14.487 R45_7.1@157.629,14.487 ; v1(159.174,15.748) v1@159.182,15.739 ; v1(163.001,16.764) 165.144,16.764 Q2_7.1@165.225,16.845
  Bottom Layer w0.3: v1(159.174,15.748) 160.19,16.764 v1(163.001,16.764)
NetQ2_7_2: Q2_7.2 R41_7.2 R42_7.2 R43_7.2 R44_7.2 | length 16.4
  Top Layer w1: Q2_7.2@165.225,15.295 Q2_7.2@168.905,15.295 168.905,13.671 169.351,13.225 v2(169.351,12.954)
  Bottom Layer w1: v2(169.351,12.954) 169.542,12.763 170.407,12.763 171.137,12.033 171.137,4.199 171.002,4.064
  other v1: 151.19,1.524 154.365,1.524 157.413,1.524 160.461,1.524 163.509,1.524 166.557,1.524 169.971,1.524 151.19,3.302 169.971,3.302 151.19,5.08 169.971,5.08
NetQ2_8_1: Q2_8.1 R45_8.1 R46_8.2 | length 11.7
  Top Layer w0.254: R45_8.1@179.61,14.487 180.557,14.487 180.736,14.666 180.736,14.8 181.102,15.165 v1(181.102,15.367)
  Top Layer w0.3: R46_8.2@178.566,12.643 178.566,14.311 178.742,14.487 R45_8.1@179.61,14.487 ; v1(184.982,16.764) 187.125,16.764 Q2_8.1@187.206,16.845
  Bottom Layer w0.3: v1(181.102,15.367) 181.102,15.508 181.703,16.109 181.703,16.297 182.171,16.764 v1(184.982,16.764)
NetQ2_8_2: Q2_8.2 R41_8.2 R42_8.2 R43_8.2 R44_8.2 | length 16.4
  Top Layer w1: Q2_8.2@187.206,15.295 Q2_8.2@190.886,15.295 190.886,13.671 191.332,13.225 v2(191.332,12.954)
  Bottom Layer w1: v2(191.332,12.954) 191.523,12.763 192.388,12.763 193.118,12.033 193.118,4.199 192.983,4.064
  other v1: 173.171,1.524 176.346,1.524 179.394,1.524 182.442,1.524 185.49,1.524 188.538,1.524 191.952,1.524 173.171,3.302 191.952,3.302 173.171,5.08 191.952,5.08
NetQ2_9_1: Q2_9.1 R45_9.1 R46_9.2 | length 12.4
  Top Layer w0.3: Q2_9.1@178.953,106.599 178.999,106.553 v1(180.923,106.553) ; v1(185.241,106.934) 185.238,106.937 185.238,108.455 185.74,108.957 R45_9.1@186.676,108.957 187.544,108.957 187.72,109.133 R46_9.2@187.72,110.801
  Bottom Layer w0.3: v1(180.923,106.553) 182.193,106.553 182.574,106.934 v1(185.241,106.934)
NetQ2_9_2: Q2_9.2 R41_9.2 R42_9.2 R43_9.2 R44_9.2 | length 19.2
  Top Layer w1: v2(173.383,106.426) 173.574,106.617 174.241,106.617 175.273,107.649 Q2_9.2@175.273,108.149 Q2_9.2@178.953,108.149
  Bottom Layer w1: 172.922,118.491 172.787,118.356 172.787,117.39 172.676,117.279 172.676,111.642 173.557,110.761 173.557,106.6 v2(173.383,106.426)
  other v1: 174.319,118.237 177.494,118.237 180.542,118.237 183.59,118.237 186.638,118.237 189.686,118.237 193.1,118.237 174.319,120.078 193.1,120.078 174.319,121.92 193.1,121.92
NetQ2_10_1: Q2_10.1 R45_10.1 R46_10.2 | length 12.4
  Top Layer w0.3: Q2_10.1@156.935,106.599 156.981,106.553 v1(158.905,106.553) ; v1(163.223,106.934) 163.22,106.937 163.22,108.455 163.722,108.957 R45_10.1@164.658,108.957 165.526,108.957 165.702,109.133 R46_10.2@165.702,110.801
  Bottom Layer w0.3: v1(158.905,106.553) 160.175,106.553 160.556,106.934 v1(163.223,106.934)
NetQ2_10_2: Q2_10.2 R41_10.2 R42_10.2 R43_10.2 R44_10.2 | length 19.2
  Top Layer w1: v2(151.365,106.426) 151.556,106.617 152.223,106.617 153.255,107.649 Q2_10.2@153.255,108.149 Q2_10.2@156.935,108.149
  Bottom Layer w1: 150.904,118.491 150.769,118.356 150.769,117.39 150.658,117.279 150.658,111.642 151.539,110.761 151.539,106.6 v2(151.365,106.426)
  other v1: 152.301,118.237 155.476,118.237 158.524,118.237 161.572,118.237 164.62,118.237 167.668,118.237 171.082,118.237 152.301,120.078 171.082,120.078 152.301,121.92 171.082,121.92
NetQ2_11_1: Q2_11.1 R45_11.1 R46_11.2 | length 12.4
  Top Layer w0.3: Q2_11.1@134.917,106.599 134.963,106.553 v1(136.887,106.553) ; v1(141.205,106.934) 141.202,106.937 141.202,108.455 141.704,108.957 R45_11.1@142.64,108.957 143.508,108.957 143.684,109.133 R46_11.2@143.684,110.801
  Bottom Layer w0.3: v1(136.887,106.553) 138.157,106.553 138.538,106.934 v1(141.205,106.934)
NetQ2_11_2: Q2_11.2 R41_11.2 R42_11.2 R43_11.2 R44_11.2 | length 19.2
  Top Layer w1: v2(129.347,106.426) 129.538,106.617 130.205,106.617 131.237,107.649 Q2_11.2@131.237,108.149 Q2_11.2@134.917,108.149
  Bottom Layer w1: 128.886,118.491 128.751,118.356 128.751,117.39 128.64,117.279 128.64,111.642 129.521,110.761 129.521,106.6 v2(129.347,106.426)
  other v1: 130.283,118.237 133.458,118.237 136.506,118.237 139.554,118.237 142.602,118.237 145.65,118.237 149.064,118.237 130.283,120.078 149.064,120.078 130.283,121.92 149.064,121.92
NetQ2_12_1: Q2_12.1 R45_12.1 R46_12.2 | length 12.4
  Top Layer w0.3: Q2_12.1@112.899,106.599 112.945,106.553 v1(114.869,106.553) ; v1(119.187,106.934) 119.184,106.937 119.184,108.455 119.686,108.957 R45_12.1@120.622,108.957 121.49,108.957 121.666,109.133 R46_12.2@121.666,110.801
  Bottom Layer w0.3: v1(114.869,106.553) 116.139,106.553 116.52,106.934 v1(119.187,106.934)
NetQ2_12_2: Q2_12.2 R41_12.2 R42_12.2 R43_12.2 R44_12.2 | length 19.2
  Top Layer w1: v2(107.329,106.426) 107.52,106.617 108.187,106.617 109.219,107.649 Q2_12.2@109.219,108.149 Q2_12.2@112.899,108.149
  Bottom Layer w1: 106.868,118.491 106.733,118.356 106.733,117.39 106.622,117.279 106.622,111.642 107.503,110.761 107.503,106.6 v2(107.329,106.426)
  other v1: 108.265,118.237 111.44,118.237 114.488,118.237 117.536,118.237 120.584,118.237 123.632,118.237 127.046,118.237 108.265,120.078 127.046,120.078 108.265,121.92 127.046,121.92
NetQ2_13_1: Q2_13.1 R45_13.1 R46_13.2 | length 12.4
  Top Layer w0.3: Q2_13.1@90.881,106.599 90.927,106.553 v1(92.851,106.553) ; v1(97.169,106.934) 97.166,106.937 97.166,108.455 97.668,108.957 R45_13.1@98.604,108.957 99.472,108.957 99.648,109.133 R46_13.2@99.648,110.801
  Bottom Layer w0.3: v1(92.851,106.553) 94.121,106.553 94.502,106.934 v1(97.169,106.934)
NetQ2_13_2: Q2_13.2 R41_13.2 R42_13.2 R43_13.2 R44_13.2 | length 19.2
  Top Layer w1: v2(85.311,106.426) 85.502,106.617 86.169,106.617 87.201,107.649 Q2_13.2@87.201,108.149 Q2_13.2@90.881,108.149
  Bottom Layer w1: 84.85,118.491 84.715,118.356 84.715,117.39 84.604,117.279 84.604,111.642 85.485,110.761 85.485,106.6 v2(85.311,106.426)
  other v1: 86.247,118.237 89.422,118.237 92.47,118.237 95.518,118.237 98.566,118.237 101.614,118.237 105.028,118.237 86.247,120.078 105.028,120.078 86.247,121.92 105.028,121.92
NetQ2_14_1: Q2_14.1 R45_14.1 R46_14.2 | length 12.4
  Top Layer w0.3: Q2_14.1@68.863,106.599 68.909,106.553 v1(70.833,106.553) ; v1(75.151,106.934) 75.148,106.937 75.148,108.455 75.65,108.957 R45_14.1@76.586,108.957 77.454,108.957 77.63,109.133 R46_14.2@77.63,110.801
  Bottom Layer w0.3: v1(70.833,106.553) 72.103,106.553 72.484,106.934 v1(75.151,106.934)
NetQ2_14_2: Q2_14.2 R41_14.2 R42_14.2 R43_14.2 R44_14.2 | length 19.2
  Top Layer w1: v2(63.293,106.426) 63.484,106.617 64.151,106.617 65.183,107.649 Q2_14.2@65.183,108.149 Q2_14.2@68.863,108.149
  Bottom Layer w1: 62.832,118.491 62.697,118.356 62.697,117.39 62.586,117.279 62.586,111.642 63.467,110.761 63.467,106.6 v2(63.293,106.426)
  other v1: 64.229,118.237 67.404,118.237 70.452,118.237 73.5,118.237 76.548,118.237 79.596,118.237 83.01,118.237 64.229,120.078 83.01,120.078 64.229,121.92 83.01,121.92
NetQ2_15_1: Q2_15.1 R45_15.1 R46_15.2 | length 14.1
  Top Layer w0.3: Q2_15.1@46.845,106.599 46.891,106.553 46.891,105.763 v1(47.625,105.029) ; v1(53.133,106.934) 53.13,106.937 53.13,108.455 53.632,108.957 R45_15.1@54.568,108.957 55.436,108.957 55.612,109.133 R46_15.2@55.612,110.801
  Bottom Layer w0.3: v1(47.625,105.029) 47.639,105.043 48.575,105.043 50.466,106.934 v1(53.133,106.934)
NetQ2_15_2: Q2_15.2 R41_15.2 R42_15.2 R43_15.2 R44_15.2 | length 19.2
  Top Layer w1: v2(41.275,106.426) 41.466,106.617 42.133,106.617 43.165,107.649 Q2_15.2@43.165,108.149 Q2_15.2@46.845,108.149
  Bottom Layer w1: 40.814,118.491 40.679,118.356 40.679,117.39 40.568,117.279 40.568,111.642 41.449,110.761 41.449,106.6 v2(41.275,106.426)
  other v1: 42.211,118.237 45.386,118.237 48.434,118.237 51.482,118.237 54.53,118.237 57.578,118.237 60.992,118.237 42.211,120.078 60.992,120.078 42.211,121.92 60.992,121.92
NetQ2_16_1: Q2_16.1 R45_16.1 R46_16.2 | length 12.4
  Top Layer w0.3: Q2_16.1@24.827,106.599 24.873,106.553 v1(26.797,106.553) ; v1(31.115,106.934) 31.112,106.937 31.112,108.455 31.614,108.957 R45_16.1@32.55,108.957 33.418,108.957 33.594,109.133 R46_16.2@33.594,110.801
  Bottom Layer w0.3: v1(26.797,106.553) 28.067,106.553 28.448,106.934 v1(31.115,106.934)
NetQ2_16_2: Q2_16.2 R41_16.2 R42_16.2 R43_16.2 R44_16.2 | length 17.3
  Top Layer w1: v2@20.115,106.867 Q2_16.2@21.147,107.898 ; Q2_16.2@21.147,108.648 Q2_16.2@21.147,108.149 Q2_16.2@24.827,108.149
  Bottom Layer w1: 18.796,118.491 18.661,118.356 18.661,117.39 18.55,117.279 18.55,111.702 18.986,111.266 ; v2@19.431,106.849 19.431,111.01
  other v1: 20.193,118.237 23.368,118.237 26.416,118.237 29.464,118.237 32.512,118.237 35.56,118.237 38.974,118.237 20.193,120.078 38.974,120.078 20.193,121.92 38.974,121.92
  other v2: 19.257,106.675
NetR1_1: R1.1 U4.2 | length 12.8
  Top Layer w1: R1.1@141.986,93.213 144.145,95.372 146.182,95.372 150.495,91.059 U4.2@150.495,89.404
NetR2_1: R2.1 U3.2 | length 7.4
  Top Layer w0.3: R2.1@72.573,93.962 72.623,93.912 72.623,93.169 73.209,92.583 75.85,92.583 77.628,90.805 U3.2@78.228,90.805
NetR9_2: R9.2 R64.1 U1.56 U2.27 | length 115.1
  Top Layer w0.3: U2.27@76.617,49.177 79.076,49.177 81.12,47.133 99.076,47.133 100.822,48.879 v1(103.077,48.879) 103.077,47.451 101.735,46.109 94.234,46.109 94.227,46.116 93.479,46.116 93.472,46.109 92.337,46.109 90.025,43.797 R64.1@90.025,41.346 ; v1(102.489,58.547) 113.792,58.547 v1(114.3,59.055) ; v1(113.919,68.453) 115.128,69.662 R9.2@122.809,69.662 122.809,68.453 v1(122.682,68.326) ; U1.56@141.22,63.612 141.22,68.703 v1(141.986,69.469)
  Bottom Layer w0.3: v1(102.489,58.547) 102.623,58.413 102.623,57.66 102.758,57.524 102.758,57.143 103.378,56.523 103.378,52.204 103.258,52.083 103.258,51.442 103.077,51.261 v1(103.077,48.879) ; v1(113.919,68.453) 114.3,68.072 v1(114.3,59.055) ; v1(122.682,68.326) 141.097,68.326 141.351,68.58 141.351,68.761 141.986,69.396 v1(141.986,69.469)
NetR10_2: R10.2 R70.1 U1.55 U2.26 | length 102.2
  Top Layer w0.3: U2.26@76.617,48.677 78.577,48.677 80.645,46.609 91.059,46.609 ; R70.1@84.526,44.849 86.976,44.849 87.376,44.449 88.901,44.449 91.059,46.607 91.059,46.609 ; v1(100.584,47.117) 100.076,46.609 94.442,46.609 94.435,46.616 93.271,46.616 93.264,46.609 91.059,46.609 ; v1(101.854,57.15) 101.981,57.277 v1(112.141,57.277) ; v1(112.014,66.802) v1(123.19,66.802) 124.816,68.428 R10.2@124.816,69.662 ; U1.55@141.72,63.612 141.72,67.116 142.233,67.629 v1(142.233,67.818)
  Bottom Layer w0.3: v1(100.584,47.117) 101.727,48.26 101.727,51.831 102.474,52.578 102.474,56.426 101.854,57.046 v1(101.854,57.15) ; v1(112.014,66.802) 112.014,57.404 v1(112.141,57.277) ; v1(123.19,66.802) 126.365,66.802 126.746,67.183 141.532,67.183 142.167,67.818 v1(142.233,67.818)
NetR30_1: R30.1 R32.2 | length 3.4
  Top Layer w0.3: R30.1@50.292,80.391 R32.2@53.694,80.391
NetR31_1: R31.1 R33.2 | length 3.6
  Top Layer w0.3: R31.1@50.065,75.184 R33.2@53.694,75.184